# EAGLE board Gilbert Cell Mixer (EAGLE 9.1.2)
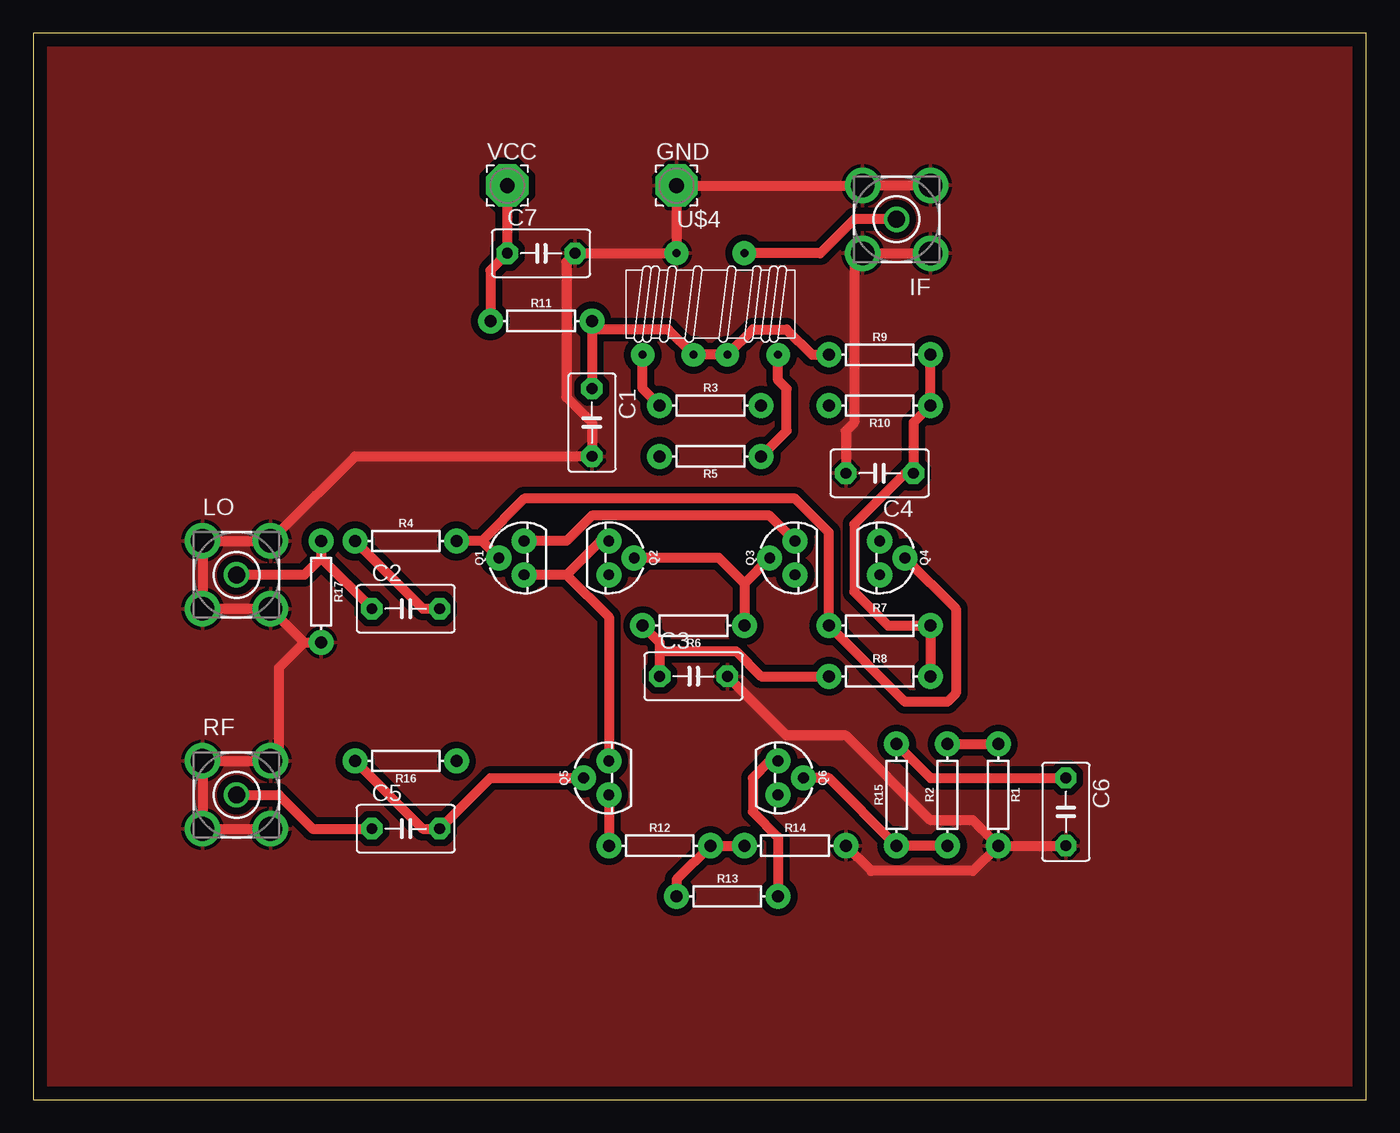
[diagram p0: board, top side]
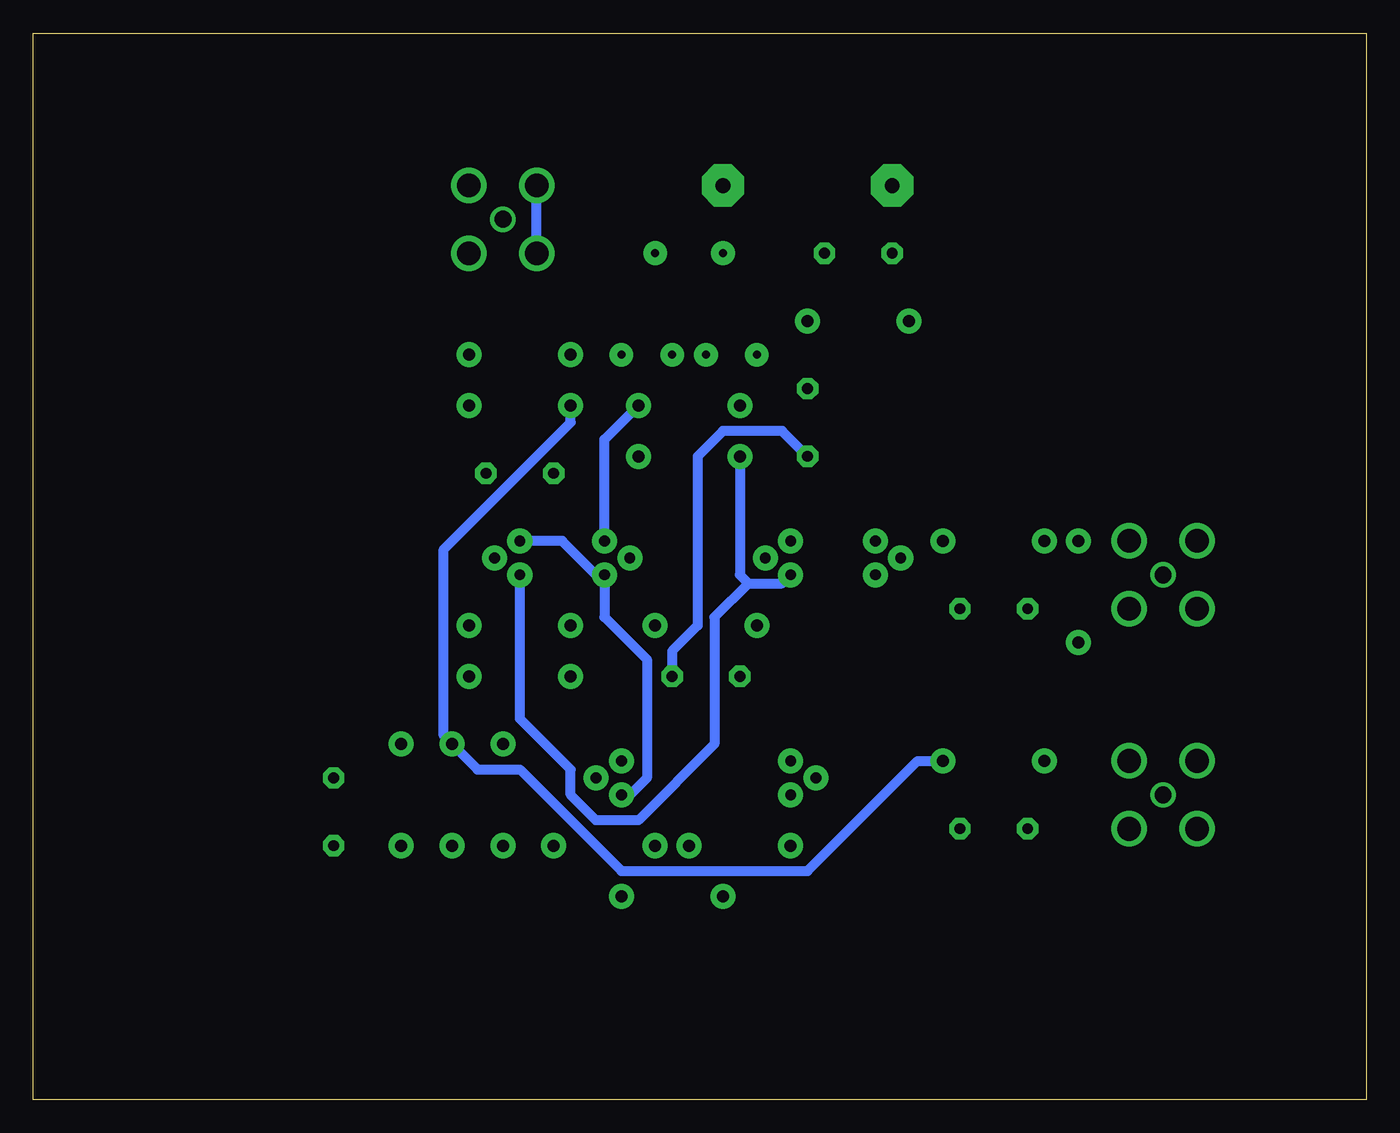
[diagram p1: board, bottom side, seen from below]

Size 100 x 80 mm. Coordinates in mm from the lower left corner, seen from the top.
Outline: 0,0 100,0 100,80 0,80 0,0
Copper layers (1*16): Top 0.035mm / dielectric 1.5mm / Bottom 0.035mm
Design rules "default": minimum track width 6mil, minimum drill 0.35mm, track to track 6mil, track to pad 6mil, pad to pad 6mil, via to via 6mil, smd to smd 6mil, copper to edge 40mil, drill to drill 6mil, minimum pad ring 10mil, minimum via ring 8mil, stop-mask expansion 4mil, vias tented up to drill 0mil, thermal gap 10mil
Net classes: 0 default: width 0.762 mm, drill 0.762 mm, clearance 0.508 mm

## Footprints (pad centres in the part's own frame; a part is rotated, then mirrored left to right if it is on the bottom)
C5B3.5 = drill 0.813 pad 1.6 octagon: 1 -2.54,0; 2 2.54,0
3,17/1,1 = drill 1.118 pad 3.175 octagon: 1 0,0
BU-SMA-V = drill 1.27: 1 0,0 | drill 1.778: 2 -2.55,2.55; 3 2.55,2.55; 4 2.55,-2.55; 5 -2.55,-2.55
TO-92 = drill 0.813 pad 1.88: 1 -1.27,0; 2 0,1.905; 3 1.27,0
AXIAL-0.3 = drill 0.9 pad 1.88: P$1 -3.81,0; P$2 3.81,0
T50_SPLITTER = drill 0.6 pad 1.778: C1A -1.27,-5.08; C1B -1.27,0; C2A 6.35,-3.81; C2B 6.35,-7.62; C3A 6.35,-1.27; C3B 6.35,2.54

## Placement (x,y rotation side)
C1  .1uF  [C5B3.5]  41.91,50.8 270 top
C2  .1uF  [C5B3.5]  27.94,36.83 0 top
C3  .1uF  [C5B3.5]  49.53,31.75 0 top
C4  .1uF  [C5B3.5]  63.5,46.99 180 top
C5  .1uF  [C5B3.5]  27.94,20.32 0 top
C6  .1uF  [C5B3.5]  77.47,21.59 270 top
C7  100uF  [C5B3.5]  38.1,63.5 0 top
GND  [3,17/1,1]  48.26,68.58 0 top
IF  BU-SMA-V  [BU-SMA-V]  64.77,66.04 180 top
LO  BU-SMA-V  [BU-SMA-V]  15.24,39.37 0 top
Q1  [TO-92]  36.83,40.64 90 top
Q2  [TO-92]  43.18,40.64 270 top
Q3  [TO-92]  57.15,40.64 90 top
Q4  [TO-92]  63.5,40.64 270 top
Q5  [TO-92]  43.18,24.13 90 top
Q6  [TO-92]  55.88,24.13 270 top
R1  2k  [AXIAL-0.3]  72.39,22.86 270 top
R2  2.2k  [AXIAL-0.3]  68.58,22.86 90 top
R3  36  [AXIAL-0.3]  50.8,52.07 0 top
R4  36  [AXIAL-0.3]  27.94,41.91 0 top
R5  36  [AXIAL-0.3]  50.8,48.26 180 top
R6  10  [AXIAL-0.3]  49.53,35.56 180 top
R7  2.2k  [AXIAL-0.3]  63.5,35.56 0 top
R8  2.2k  [AXIAL-0.3]  63.5,31.75 0 top
R9  4.7k  [AXIAL-0.3]  63.5,55.88 0 top
R10  3k  [AXIAL-0.3]  63.5,52.07 180 top
R11  100  [AXIAL-0.3]  38.1,58.42 0 top
R12  22  [AXIAL-0.3]  46.99,19.05 0 top
R13  22  [AXIAL-0.3]  52.07,15.24 0 top
R14  300  [AXIAL-0.3]  57.15,19.05 0 top
R15  36  [AXIAL-0.3]  64.77,22.86 90 top
R16  2.2k  [AXIAL-0.3]  27.94,25.4 180 top
R17  51  [AXIAL-0.3]  21.59,38.1 270 top
RF  BU-SMA-V  [BU-SMA-V]  15.24,22.86 0 top
U$4  T50_SPLITTER  [T50_SPLITTER]  53.34,62.23 270 top
VCC  [3,17/1,1]  35.56,68.58 0 top

## Library data of the parts
C1-C7 = capacitor-wima
GND VCC = wirepad
IF LO RF = con-coax; OC_FARNELL: unknown; OC_NEWARK: unknown
Q1-Q6 = SparkFun-DiscreteSemi; PROD_ID: TRANS-08447
R1-R17 = SparkFun-Resistors; PROD_ID: RES-12182
U$4 = toroid

## Nets
GND: C1.2 C3.2 C4.2 C6.2 C7.2 GND.1 IF.2 IF.3 IF.4 IF.5 LO.2 LO.3 LO.4 LO.5 R1.P$2 R14.P$2 R17.P$2 RF.2 RF.3 RF.4 RF.5 U$4.C1A
N$1: Q1.1 Q2.1 Q5.3
N$2: Q1.2 Q4.2 R4.P$2 R7.P$1
N$3: R1.P$1 R2.P$2 R10.P$2 R16.P$1
N$4: C1.1 R9.P$1 R11.P$2 U$4.C2A U$4.C3A
N$5: IF.1 U$4.C1B
N$6: Q3.1 Q4.1 Q6.3
N$7: Q1.3 Q3.3 R3.P$2
N$8: C2.1 LO.1 R17.P$1
N$9: C3.1 R6.P$2 R8.P$1
N$10: Q2.3 Q4.3 R5.P$2
N$11: C6.1 R15.P$2
N$12: Q6.2 R2.P$1 R15.P$1
N$13: Q2.2 Q3.2 R6.P$1
N$14: C4.1 R7.P$2 R8.P$2 R9.P$2 R10.P$1
N$15: R3.P$1 U$4.C2B
N$16: R5.P$1 U$4.C3B
N$17: C2.2 R4.P$1
N$18: Q5.1 R12.P$1
N$19: R12.P$2 R13.P$1 R14.P$1
N$20: Q6.1 R13.P$2
N$21: C5.1 RF.1
N$22: C5.2 Q5.2 R16.P$2
VCC: C7.1 R11.P$1 VCC.1

## Tracks (layer width: path | path; a pad name or v marks a point on that pad's centre or on a via)
GND
  Top 0.762: C3.2 56.52,27.3 60.96,27.3 67.31,20.95 70.48,20.95 R1.P$2 | R1.P$2 C6.2 | R14.P$2 62.87,17.14 70.48,17.14 R1.P$2 | RF.2 RF.5 | RF.5 | RF.2 | RF.5 RF.4 | RF.2 RF.3 18.41,26.04 18.41,32.38 20.32,34.29 | 20.32,34.29 R17.P$2 | 20.32,34.29 18.41,36.2 LO.4 LO.5 | LO.2 LO.5 | LO.5 | LO.2 | LO.2 LO.3 18.41,42.55 24.13,48.26 C1.2 41.91,50.8 40.01,52.7 40.01,62.87 C7.2 U$4.C1A GND.1 61.59,68.58 IF.4 IF.5 | C4.2 60.96,50.16 61.59,50.8 61.59,62.87 IF.3 IF.2
  Bottom 0.762: IF.4 IF.3 | C3.2 52.07,33.66 50.16,35.56 50.16,48.26 48.26,50.16 43.81,50.16 C1.2
  pour Top: 0,80.01 100.33,80.01 100.33,0 0,0
N$1
  Top 0.762: 40.01,39.37 Q1.1 | 40.01,39.37 42.55,41.91 Q2.1 | Q5.3 43.18,36.2 40.01,39.37
N$2
  Top 0.762: 33.66,41.91 R4.P$2 | Q1.2 33.66,41.91 | Q4.2 69.22,36.83 69.22,30.48 68.58,29.84 65.41,29.84 R7.P$1 59.69,42.55 57.15,45.09 36.83,45.09 33.66,41.91
N$3
  Top 0.762: R2.P$2 R1.P$1
  Bottom 0.762: R16.P$1 33.66,25.4 41.91,17.14 55.88,17.14 63.5,24.77 66.67,24.77 R2.P$2 69.22,27.3 69.22,41.27 59.69,50.8 R10.P$2
N$4
  Top 0.762: 41.91,57.78 R11.P$2 41.91,57.78 | 41.91,57.78 C1.1 | R9.P$1 58.42,55.88 56.52,57.78 53.98,57.78 U$4.C3A U$4.C2A 47.62,57.78 41.91,57.78
N$5
  Top 0.762: U$4.C1B 59.05,63.5 61.59,66.04 IF.1
N$6
  Bottom 0.762: Q6.3 55.24,22.86 53.98,24.13 53.98,33.02 57.15,36.2 57.15,38.73 | 57.15,38.73 Q3.1 57.15,38.73 | Q4.1 60.33,41.91 57.15,38.73
N$7
  Top 0.762: Q1.3 40.01,41.91 41.91,43.81 55.24,43.81 Q3.3
  Bottom 0.762: R3.P$2 57.15,49.53 Q3.3
N$8
  Top 0.762: 21.59,40.64 C2.1 | R17.P$1 21.59,40.64 | LO.1 20.32,39.37 21.59,40.64
N$9
  Top 0.762: 46.99,33.66 46.99,34.29 R6.P$2 | 46.99,33.66 C3.1 | R8.P$1 54.61,31.75 52.7,33.66 46.99,33.66
N$10
  Bottom 0.762: Q2.3 43.81,38.73 46.35,38.73 | 46.35,38.73 46.99,39.37 R5.P$2 | Q4.3 63.5,28.57 59.69,24.77 59.69,22.86 57.78,20.95 54.61,20.95 48.9,26.67 48.9,36.2 46.35,38.73
N$11
  Top 0.762: C6.1 67.31,24.13 R15.P$2
N$12
  Top 0.762: R2.P$1 R15.P$1 59.69,24.13 Q6.2
N$13
  Top 0.762: 53.34,38.73 R6.P$1 | Q3.2 53.34,38.73 | Q2.2 51.44,40.64 53.34,38.73
N$14
  Top 0.762: R8.P$2 R7.P$2 64.14,35.56 61.59,38.1 61.59,43.18 66.04,47.62 | 66.04,47.62 66.04,50.8 R10.P$1 R9.P$2 | 66.04,47.62 C4.1 66.04,47.62
N$15
  Top 0.762: U$4.C2B 45.72,53.34 R3.P$1
N$16
  Top 0.762: U$4.C3B 55.88,53.98 56.52,53.34 56.52,50.16 R5.P$1
N$17
  Top 0.762: C2.2 29.21,36.83 R4.P$1
N$18
  Top 0.762: Q5.1 R12.P$1
N$19
  Top 0.762: R13.P$1 48.26,16.51 R12.P$2 R14.P$1
N$20
  Top 0.762: R13.P$2 55.88,19.68 53.98,21.59 53.98,24.13 55.24,25.4 Q6.1
N$21
  Top 0.762: C5.1 20.95,20.32 18.41,22.86 RF.1
N$22
  Top 0.762: R16.P$2 29.21,20.32 C5.2 34.29,24.13 Q5.2
VCC
  Top 0.762: VCC.1 C7.1 34.29,62.23 R11.P$1